# Altium PCB Печатная плата Peggy Tracker.PcbDoc
Units mm, origin at the board's own origin, x right, y up, seen from the top; angles counter-clockwise.
Board outline 35 x 62 mm, 2 copper layers (Top Layer, Bottom Layer), stack 1.534 mm thick; 43 components, 34 nets, 130 pads, 81 vias.
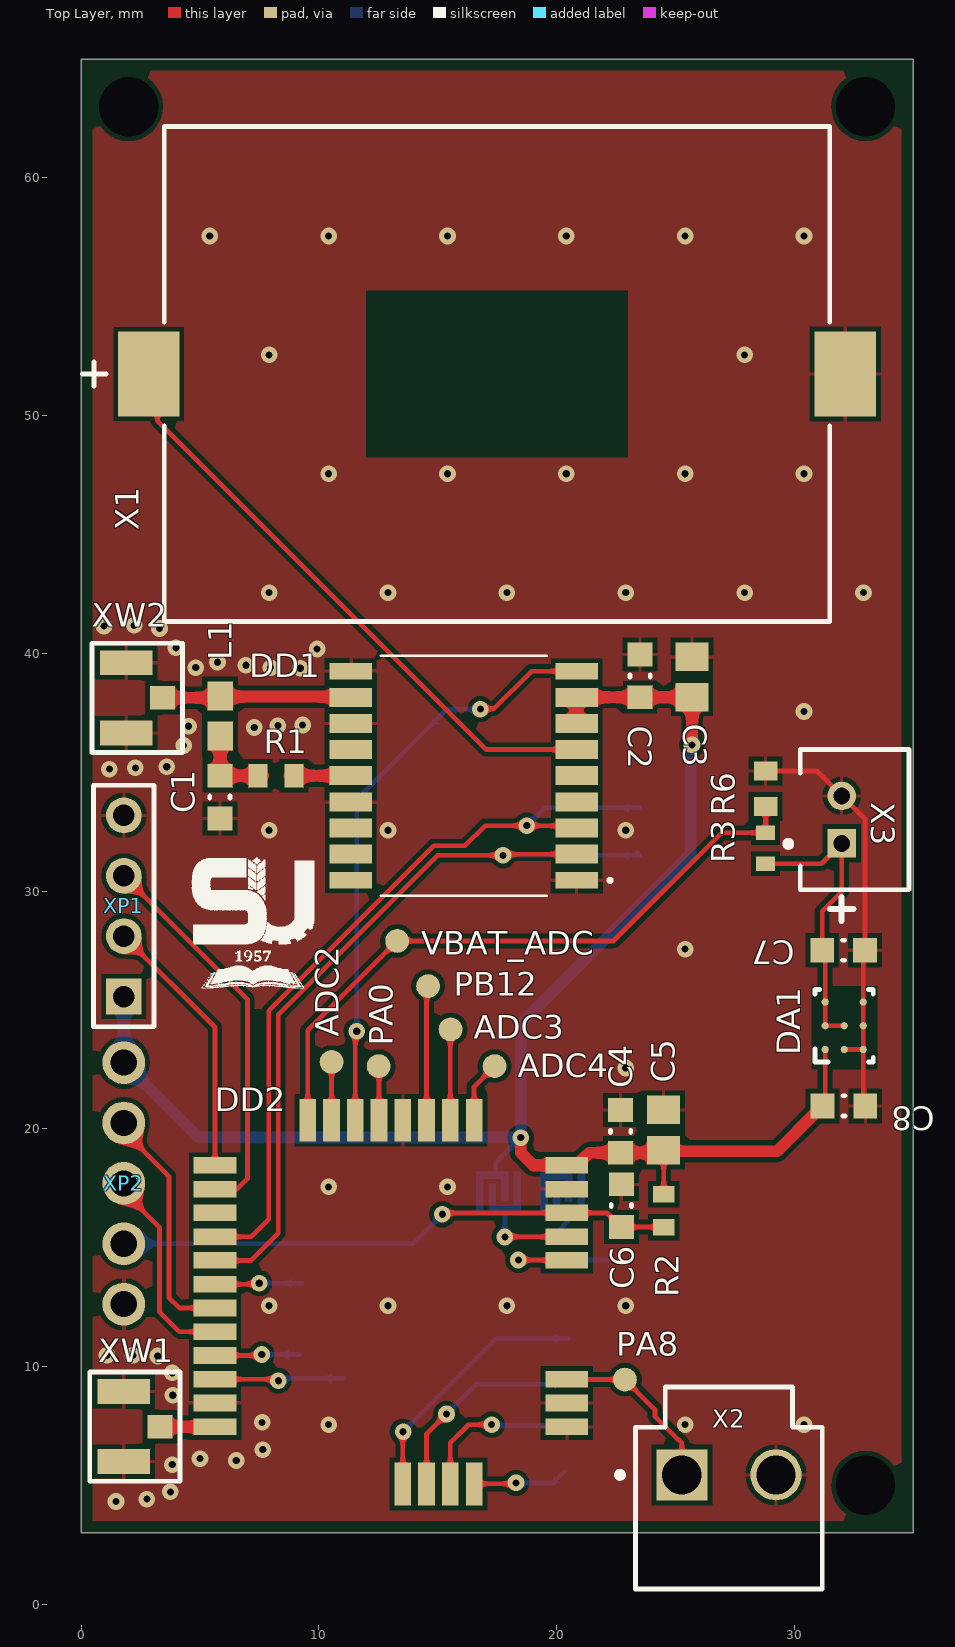
[diagram p0: Top Layer view]
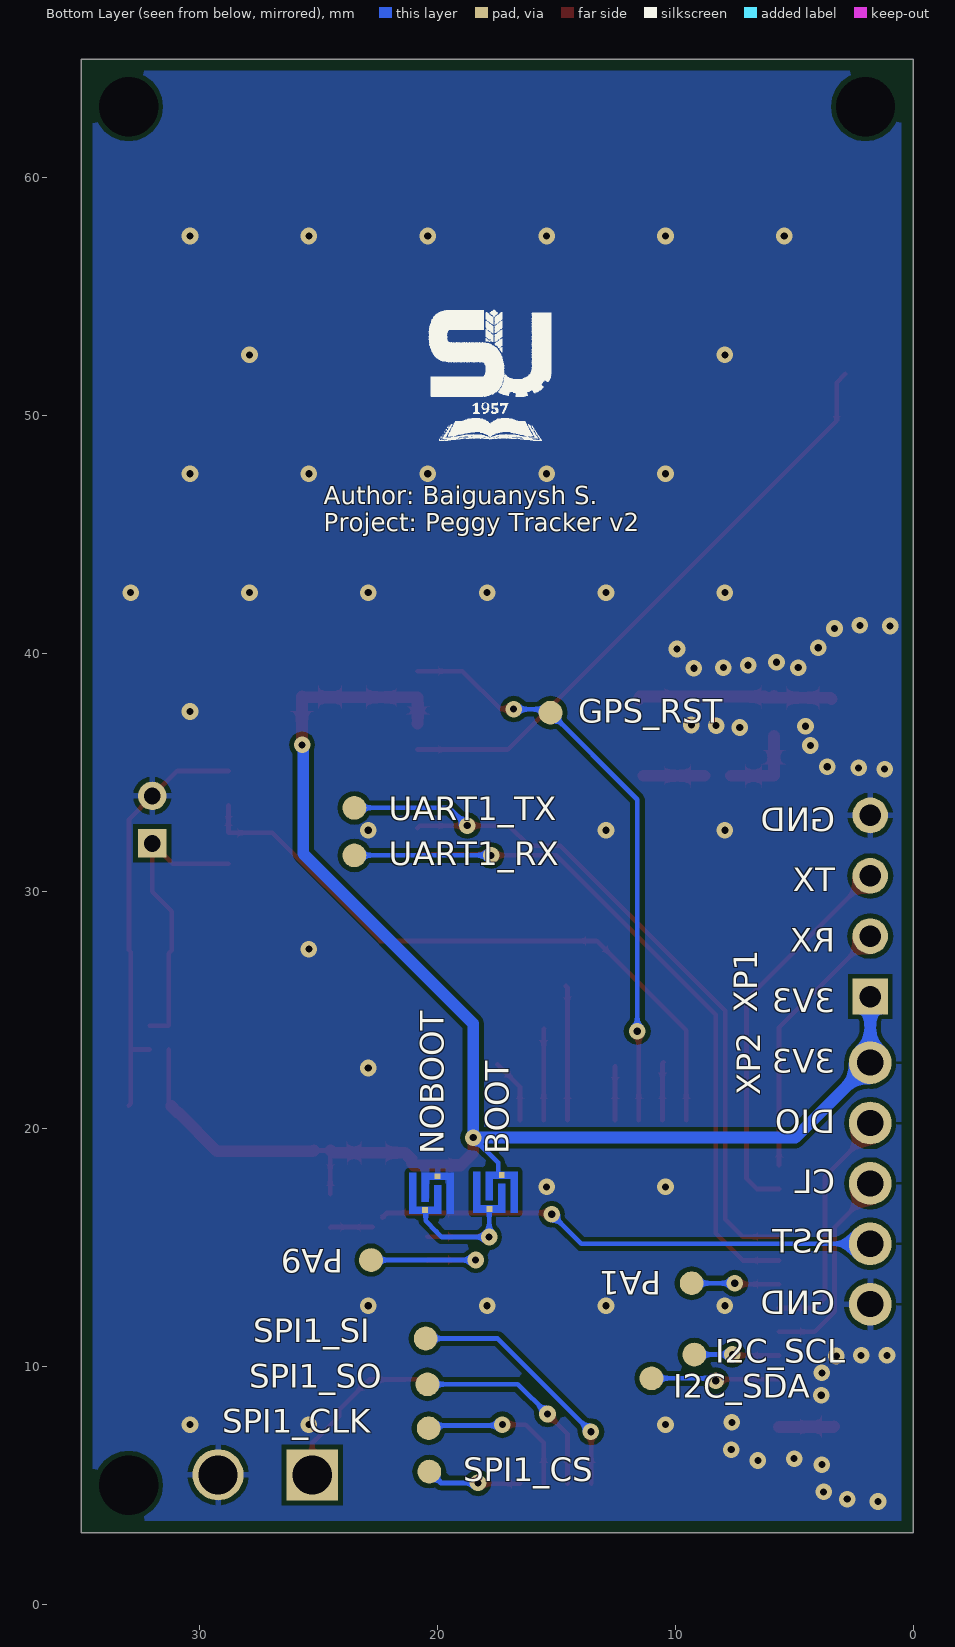
[diagram p1: Bottom Layer view, seen from below]
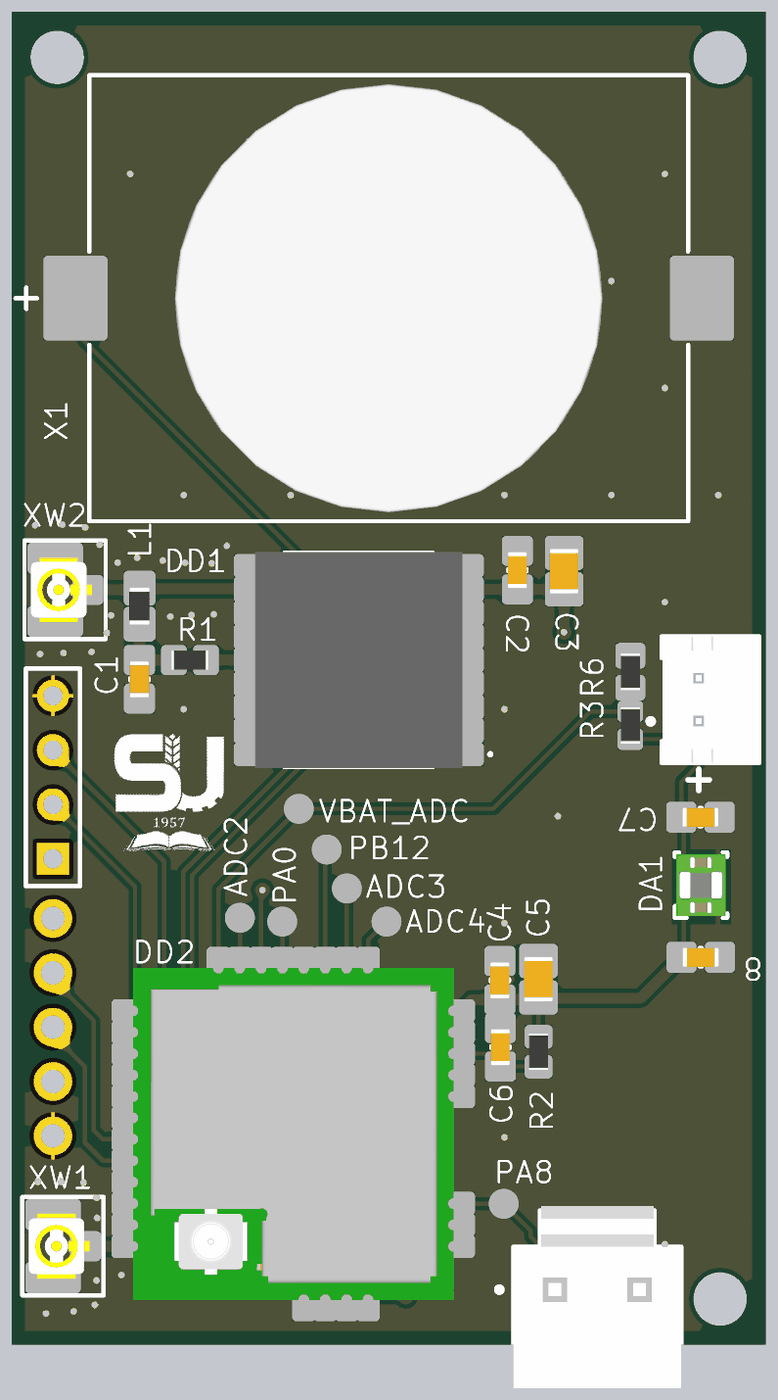
[diagram p2: 3D render of the assembled board from above, using the file's embedded part models]

## Layer stack, top to bottom
Top Solder: solder mask 0.0127, Solder Resist, Dk 3.3
Top Layer: signal copper 0.0178
Dielectric1: core 1.4986, FR-4, Dk 4.3
Bottom Layer: signal copper 0.0178
Bottom Solder: solder mask 0.0127, Solder Resist, Dk 3.3

## Board outline
0,3 0,65 35,65 35,3

## Design rules (kind name [scope] priority, off if disabled: settings)
Clearance [All] p1: gap=0.2 ignorepadtopadclearanceinfootprint=TRUE
ComponentClearance [All] p1: gap=0.25 collisioncheckmode=3 verticalgap=0.25 showdistances=FALSE
DiffPairsRouting [All] p1: maxlimit=0.25 minlimit=0.15 mostfreqgap=0.25 toplayer_minwidth=0.15 toplayer_maxwidth=0.254 toplayer_prefwidth=0.254 bottomlayer_minwidth=0.15 bottomlayer_maxwidth=0.254 bottomlayer_prefwidth=0.254 maxuncoupledlength=12.7
HoleSize [All] p1: absolutevalues=TRUE maxlimit=8 minlimit=0.3 maxpercent=80.000 minpercent=20.000
MinimumAnnularRing [All] p1: minimumring=0.2
MinimumSolderMaskSliver [All] p1: minsoldermaskwidth=0.2
PasteMaskExpansion [All] p1: expansion=0.2
PlaneClearance [All] p1: clearance=0.381
PlaneConnect [All] p1: pad.planeconnectstyle=Relief pad.reliefexpansion=0.508 pad.reliefentries=4 pad.reliefconductorwidth=0.15 pad.reliefairgap=0.254 via.planeconnectstyle=Direct via.reliefexpansion=0.508 via.reliefentries=4 via.reliefconductorwidth=0.254 via.reliefairgap=0.254
PolygonConnect PolygonConnect_1 [Name = 'GND_to_dcdc'] p1: connectstyle=Direct reliefconductorwidth=0.254 reliefentries=4 polygonreliefangle="90 Angle" airgapwidth=0.254
PolygonConnect PolygonConnect_3.3 [InNet('3.3V') vs InNet('3.3V')] p2: connectstyle=Direct reliefconductorwidth=0.254 reliefentries=4 polygonreliefangle="90 Angle" airgapwidth=0.2
PolygonConnect PolygonConnect_VBAT [InNet('VBAT') vs InNet('VBAT')] p3: connectstyle=Direct reliefconductorwidth=0.254 reliefentries=4 polygonreliefangle="90 Angle" airgapwidth=0.2
PolygonConnect [All] p4: thpad.connectstyle=Relief thpad.reliefconductorwidth=0.15 thpad.reliefentries=4 thpad.polygonreliefangle="90 Angle" thpad.airgapwidth=0.2 smdpad.connectstyle=Relief smdpad.reliefconductorwidth=0.15 smdpad.reliefentries=4 smdpad.polygonreliefangle="90 Angle" smdpad.airgapwidth=0.2 via.connectstyle=Direct via.reliefconductorwidth=0.254 via.reliefentries=4 via.polygonreliefangle="90 Angle" via.airgapwidth=0.254
RoutingCorners [All] p1: cornerstyle=45-Degree minsetback=2.5 maxsetback=2.5
RoutingVias [All] p1: holewidth=0.3 width=0.6 viastyle="Through Hole" minholewidth=0.3 minwidth=0.6 maxholewidth=0.5 maxwidth=0.8
SMDEntry [All] p1: side=TRUE corner=TRUE anyangle=TRUE
SMDNeckDown [All] p1: percent=100.000
SilkToSilkClearance [All] p1: silktosilkclearance=0.15
SilkToSolderMaskClearance SilkscreenOverComponentPads [IsPad] p1: minsilkscreentomaskgap=0.15 clearancetoexposedcopper=TRUE
SolderMaskExpansion [All] p1: expansion=0.2 istentingtop=FALSE
Width [All] p1: maxlimit=1 minlimit=0.15 preferedwidth=0.25 minimp=50.000000 maximp=50.000000 favimp=50.000000
20 further rules are at their usual default settings.

## Components (designator, comment, footprint, x,y, rotation, side; value= is the part's Value field where it differs from the comment)
ADC2 "TP_1MM" "New footprint 1" 10.541,22.809 r0 top
ADC3 "TP_1MM" "New footprint 1" 15.545,24.181 r90 top
ADC4 "TP_1MM" "New footprint 1" 17.399,22.631 r270 top
BOOT "Jumper_solderable" JUMPER-Footprint-3 17.55,17.275 r180 bottom
C1 "GCM188R71H103KA37D" CAPC1608X09N 5.842,33.949 r270 top value=10nF
C2 "GCM188R71H104KA57D" CAPC1608X09N 23.52,39.051 r90 top value=100nF
C3 "CL21Y106KPQVPNE" CAPC2013X135X45NL10T25 25.705,39.001 r270 top value=10µF
C4 "GCM188R71H104KA57D" CAPC1608X09N 22.7,19.888 r270 top value=100nF
C5 "CL21Y106KPQVPNE" CAPC2013X135X45NL10T25 24.505,19.939 r270 top value=10µF
C6 "GCM188R71H104KA57D" CAPC1608X09N 22.727,16.763 r270 top value=100nF
C7 "GCM188R71H104KA57D" CAPC1608X09N 32.08,27.508 r0 top value=100nF
C8 "GCM188R71H104KA57D" CAPC1608X09N 32.093,20.964 r0 top value=100nF
DA1 "TPS82698SIPR" SIP0008A 32.106,24.333 r90 top
DD1 "MAX-M8C-0" MAXM8C0 16.1,34.85 r0 top
DD2 "RAK3172(H)" RAK3172(H)-Footprint-1 20.536,4.96 r90 top
GPS_RST "TP_1MM" "New footprint 1" 15.25,37.5 r0 bottom
I2C_SCL "TP_1MM" "New footprint 1" 9.2,10.5 r0 bottom
I2C_SDA "TP_1MM" "New footprint 1" 11,9.5 r0 bottom
L1 "LQW18AN27NJ00D" INDC1608X10M 5.85,37.366 r90 top
NOBOOT "Jumper_solderable" JUMPER-Footprint-3 20.25,17.225 r180 bottom
PA0 "TP_1MM" "New footprint 1" 12.522,22.631 r270 top
PA1 "TP_1MM" "New footprint 1" 9.31,13.5 r270 bottom
PA8 "TP_1MM" "New footprint 1" 22.879,9.449 r0 top
PA9 "TP_1MM" "New footprint 1" 22.8,14.475 r0 bottom
PB12 "TP_1MM" "New footprint 1" 14.6,26 r90 top
R1 "SG73P1JTTD100J" RESC1608X55X25ML10T15 8.204,34.849 r0 top value=10
R2 "RMCF0603FT10K0" RESC1608X55X25NL10T15 24.511,16.55 r90 top
R3 "RMCF0603FT100K" RESC1608X55X25LL10T15 28.8,31.8 r270 top
R6 "ERJ-3EKF2373V" RESC1608X55X25ML10T15 28.8,34.3 r270 top
SPI1_CLK "TP_1MM" "New footprint 1" 20.375,7.4 r0 bottom
SPI1_CS "TP_1MM" "New footprint 1" 20.35,5.575 r0 bottom
SPI1_SI "TP_1MM" "New footprint 1" 20.5,11.175 r0 bottom
SPI1_SO "TP_1MM" "New footprint 1" 20.425,9.25 r0 bottom
UART1_RX "TP_1MM" "New footprint 1" 23.5,31.5 r90 bottom
UART1_TX "TP_1MM" "New footprint 1" 23.5,33.5 r90 bottom
VBAT_ADC "TP_1MM" "New footprint 1" 13.3,27.9 r90 top
X1 "BA2032SM" MPD-BA2032SM_V 17.5,51.75 r0 top
X2 "B2P-VH(LF)(SN)" JST-B2P-VH(LF)(SN)_V 27.254,4.039 r0 top
X3 "B2B-PH-K-S" JST-S2B-PH-K-S_V 34.45,33 r90 top
XP1 "61300411121" 20021311-00010T4LF-Footprint-1 1.8,25.56 r90 top
XP2 "5-146278-5" 5-146278-8-Footprint-1 1.8,17.7 r270 top
XW1 "CONUFL001-SMD-T" u.Fl 2.565,7.468 r90 top
XW2 "CONUFL001-SMD-T" u.Fl 2.667,38.128 r90 top

## Footprints (in the part's own frame and the unit in brackets; to place one, negate y for a bottom-side part, rotate by r counter-clockwise, add the part's x,y. Pads: shape width x height; smd on the part's side, far side on the other; paste and mask are expansions set on the pad)
5-146278-8-Footprint-1 [mm]
  round 1.8 hole 1.1: 1(-5.08,0) 2(-2.54,0) 3(0,0) 4(2.54,0) 5(5.08,0)
20021311-00010T4LF-Footprint-1 [mm]
  rect 1.5x1.5 hole 0.9: 1(0,0)
  round 1.5 hole 0.9: 2(2.54,0) 3(5.08,0) 4(7.62,0)
  silkscreen extent -1.27,-1.27 8.89,1.27
CAPC1608X09N [mm] "Chip Capacitor, 2-Leads, Body 1,60x0,80mm, IPC Medium Density"
  rect 1x1.05 smd: 1(-0.9,0) 2(0.9,0)
  silkscreen extent -0.05,-0.43 0.05,0.43, body extent -0.85,-0.45 0.85,0.45, height 0.9
CAPC2013X135X45NL10T25 [mm] "Chip Capacitor, 2-Leads, Body 2.10x1.35mm, IPC Medium Density"
  rect 1.2x1.4 smd: 1(-0.85,0) 2(0.85,0)
  body extent -1.05,-0.67 1.05,0.67, height 1.35
INDC1608X10M [mm] "Chip Inductor, 2-Leads, Body 1,60x0,80mm, IPC Low Density"
  rect 1.22x1.08 smd: 1(-0.84,0) 2(0.84,0)
  body extent -0.87,-0.48 0.87,0.48, height 0.95
JST-B2P-VH(LF)(SN)_V [mm] "THD, 2-Leads, Body 8.5x7.86mm, Pitch 3.96mm"
  rect 2.15x2.15 hole 1.65: 1(-1.98,1.4)
  round 2.15 hole 1.65: 2(1.98,1.4)
  silkscreen extent -4.7,-3.4 3.93,5.1, body extent -3.93,-3.2 3.93,5.3, height 10.9
JST-S2B-PH-K-S_V [mm] "THD, 2-Leads, Body 7.6x5.9mm, Pitch 2mm"
  rect 1.2x1.2 hole 0.7: 1(-1,2.45)
  round 1.2 hole 0.7: 2(1,2.45)
  silkscreen extent -2.95,-0.38 2.95,4.82, body extent -2.95,-0.34 2.95,4.16, height 6
JUMPER-Footprint-3 [mm]
  rect 0.25x0.25 smd paste+0 mask+0: 1(-0.275,-0.65)
  rect 0.25x0.25 smd paste-2.54 mask-2.54: 2(0.25,0.775)
  Top Layer region: 0.1,-0.5 0.1,0.4 0.4,0.4 0.4,-0.8 -0.95,-0.8 -0.95,0.925 -0.65,0.925 -0.65,-0.5
  Top Layer region: -0.125,0.625 -0.125,-0.288 -0.425,-0.288 -0.425,0.925 0.925,0.925 0.925,-0.8 0.625,-0.8 0.625,0.625
MAXM8C0 [mm]
  rect 1.8x0.7 smd: 1(4.75,-4.4) 9(4.75,4.4) 10(-4.75,4.4) 18(-4.75,-4.4)
  rect 1.8x0.8 smd: 2(4.75,-3.3) 3(4.75,-2.2) 4(4.75,-1.1) 5(4.75,0) 6(4.75,1.1) 7(4.75,2.2) 8(4.75,3.3) 11(-4.75,3.3) 12(-4.75,2.2) 13(-4.75,1.1) 14(-4.75,0) 15(-4.75,-1.1) 16(-4.75,-2.2) 17(-4.75,-3.3)
  silkscreen extent -3.5,-5.05 6.2,5.05, body extent -4.85,-5.05 4.85,5.05, height 2.8
MPD-BA2032SM_V [mm] "Coin Cell Holder, 2-Leads, Body 28x16mm"
  rect 2.6x3.56 smd: 1(-14.65,0) 2(14.65,0)
  Top Layer pour cut-out: -5.5,3.5 -5.5,-3.5 5.5,-3.5 5.5,3.5
  silkscreen extent -17.45,-10.41 14,10.41, body extent -14,-10 14,10, height 6.7
"New footprint 1" [mm]
  round 1 smd: 1(0,0)
RAK3172(H)-Footprint-1 [mm]
  rect 0.7x1.8 smd: 1(13.5,14.9) 2(12.5,14.9) 3(11.5,14.9) 4(10.5,14.9) 5(9.5,14.9) 6(8.5,14.9) 7(7.5,14.9) 8(6.5,14.9) 9(5.5,14.9) 10(4.5,14.9) 11(3.5,14.9) 12(2.5,14.9) 17(2.5,0.1) 18(3.5,0.1) 19(4.5,0.1) 20(9.5,0.1) 21(10.5,0.1) 22(11.5,0.1) 23(12.5,0.1) 24(13.5,0.1)
  rect 1.8x0.7 smd: 13(0.1,7) 14(0.1,6) 15(0.1,5) 16(0.1,4) 25(15.4,4) 26(15.4,5) 27(15.4,6) 28(15.4,7) 29(15.4,8) 30(15.4,9) 31(15.4,10) 32(15.4,11)
  body extent 0,0 15.5,15, height 3.5
RESC1608X55X25LL10T15 [mm] "Chip Resistor, 2-Leads, Body 1.70x0.90mm, IPC High Density"
  rect 0.6x0.8 smd: 1(-0.65,0) 2(0.65,0)
  body extent -0.85,-0.45 0.85,0.45, height 0.55
RESC1608X55X25ML10T15 [mm] "Chip Resistor, 2-Leads, Body 1.70x0.90mm, IPC Low Density"
  rect 0.8x1 smd: 1(-0.75,0) 2(0.75,0)
  body extent -0.85,-0.45 0.85,0.45, height 0.55
RESC1608X55X25NL10T15 [mm] "Chip Resistor, 2-Leads, Body 1.70x0.90mm, IPC Medium Density"
  rect 0.7x0.9 smd: 1(-0.7,0) 2(0.7,0)
  body extent -0.85,-0.45 0.85,0.45, height 0.55
SIP0008A [mm]
  round 0.3 smd paste+0.02 mask+0.051: A1(-1,0.8) A2(0,0.8) A3(1,0.8) B1(-1,0) B2(0,0) C1(-1,-0.8) C2(0,-0.8) C3(1,-0.8)
  silkscreen extent -1.53,-1.22 1.53,1.22, body extent -1.45,-1.15 1.45,1.15, height 0.93
u.Fl [mm] "U.FL (UMCC), IPEX MHF1"
  rect 1x1.05 smd: 1(0,-0.763)
  rect 1.05x2.2 smd: 2(-1.475,0.763) 2(1.475,0.763)
  silkscreen extent -2.3,-1.6 2.3,2.2, body extent -1.5,-0.95 1.5,1.9, height 1.27

## Part data
ADC2 ADC3 ADC4 GPS_RST I2C_SCL I2C_SDA PA0 PA1 PA8 PA9 PB12 SPI1_CLK SPI1_CS SPI1_SI SPI1_SO UART1_RX UART1_TX VBAT_ADC: library part CMP-002-00080-4, "Test Point, 1mm diam", Manufacturer=SRG_DEV, Manufacturer Part Number=TP_1MM, Pins=1
BOOT NOBOOT: library part CMP-002-00130-2, "Solderable Jumper", Manufacturer="Home made", Max Operating Temperature=125°C, Min Operating Temperature=-40°C, Connector Type="Male Pin", Gender=Male, Manufacturer Part Number="Home made", Pins=2
C1: library part CMP-001-00124-4, "CAP CER 10000PF 50V X7R 0603", Case Code (Metric)=1608, Case/Package=0603, Dielectric=X7R, Manufacturer=Murata, Max Operating Temperature=125°C, Min Operating Temperature=-55°C, Package Quantity=1, Ratings=AEC-Q200, Tolerance=10%, Voltage=50V, ComponentLink1Description=https://datasheet.ciiva.com/16624/product-16624561.pdf?src-supplier=Avnet+Europe, ComponentLink1URL=https://datasheet.ciiva.com/16624/product-16624561.pdf?src-supplier=Avnet+Europe, ComponentLink2Description=https://datasheet.ciiva.com/132/product-132006.pdf?src-supplier=Digi-Key, ComponentLink2URL=https://datasheet.ciiva.com/132/product-132006.pdf?src-supplier=Digi-Key, ComponentLink3Description=https://datasheet.ciiva.com/11789/0900766b80ef92d0-11789046.pdf?src-supplier=RSComponents, ComponentLink3URL=https://datasheet.ciiva.com/11789/0900766b80ef92d0-11789046.pdf?src-supplier=RSComponents, ComponentLink4Description=https://datasheet.ciiva.com/18183/getdatasheetpartid-178897-18183622.pdf?src-supplier=Verical, ComponentLink4URL=https://datasheet.ciiva.com/18183/getdatasheetpartid-178897-18183622.pdf?src-supplier=Verical, ComponentLink5Description=https://datasheet.ciiva.com/132/product-132007.pdf?src-supplier=Digi-Key, ComponentLink5URL=https://datasheet.ciiva.com/132/product-132007.pdf?src-supplier=Digi-Key, ComponentLink6Description=https://datasheet.ciiva.com/16213/s0717e-16213899.pdf?src-supplier=Future+Electronics, ComponentLink6URL=https://datasheet.ciiva.com/16213/s0717e-16213899.pdf?src-supplier=Future+Electronics, Construction=Flat, Depth=0.8mm, Design Item ID=1_7, Height=0.8mm, Lead Free="Lead Free", Length=1.6mm, Lybrary Path=Capacitors.SchLib, Manufacturer Part Number=GCM188R71H103KA37D, Mount="Surface Mount", Packaging="Tape and Reel", Pricing 1="1=0,17000, 10=0,11900, 50=0,06740, 100=0,05580, 500=0,03912, 1000=0,03239 (USD)", Radiation Hardening=No, REACH SVHC="No SVHC", RoHS=Yes, RoHS Compliant=Yes, Series=GCM, Source=Meteo_1.SCHLIB, Stock 1=4826468, Termination=SMD/SMT, Thickness=0.035inch, Voltage Rating=50V, Voltage Rating (DC)=50V, Width=0.031inch
C2 C4 C6 C7 C8: library part CMP-001-00128-5, "CAP CER 0.1UF 50V X7R 0603", Case Code (Metric)=1608, Case/Package=0603, Color=Grey, Dielectric=X7R, Manufacturer=Murata, Max Operating Temperature=125°C, Min Operating Temperature=-55°C, Package Quantity=1, Ratings=AEC-Q200, Tolerance=10%, Voltage=50V, Approvals=CSA,UR, ComponentLink1Description=https://datasheet.ciiva.com/16624/product-16624562.pdf?src-supplier=Avnet+Europe, ComponentLink1URL=https://datasheet.ciiva.com/16624/product-16624562.pdf?src-supplier=Avnet+Europe, ComponentLink2Description=https://datasheet.ciiva.com/133/product-133574.pdf?src-supplier=Digi-Key, ComponentLink2URL=https://datasheet.ciiva.com/133/product-133574.pdf?src-supplier=Digi-Key, ComponentLink3Description=https://datasheet.ciiva.com/133/product-133575.pdf?src-supplier=Digi-Key, ComponentLink3URL=https://datasheet.ciiva.com/133/product-133575.pdf?src-supplier=Digi-Key, ComponentLink4Description=https://datasheet.ciiva.com/18183/getdatasheetpartid-98693-18183626.pdf?src-supplier=Verical, ComponentLink4URL=https://datasheet.ciiva.com/18183/getdatasheetpartid-98693-18183626.pdf?src-supplier=Verical, ComponentLink5Description=https://datasheet.ciiva.com/11786/0900766b80ef92d0-11786863.pdf?src-supplier=RSComponents, ComponentLink5URL=https://datasheet.ciiva.com/11786/0900766b80ef92d0-11786863.pdf?src-supplier=RSComponents, ComponentLink6Description=https://datasheet.ciiva.com/133/product-133573.pdf?src-supplier=Digi-Key, ComponentLink6URL=https://datasheet.ciiva.com/133/product-133573.pdf?src-supplier=Digi-Key, ComponentLink7Description=https://datasheet.ciiva.com/2989/product-2989242.pdf?src-supplier=Avnet, ComponentLink7URL=https://datasheet.ciiva.com/2989/product-2989242.pdf?src-supplier=Avnet, ComponentLink8Description=https://datasheet.ciiva.com/16497/product-16497247.pdf?src-supplier=Future+Electronics, ComponentLink8URL=https://datasheet.ciiva.com/16497/product-16497247.pdf?src-supplier=Future+Electronics, Construction=Flat, Depth=0.8mm, Design Item ID=1_16, Height=0.8mm, Lead Free="Lead Free", Length=1.6mm, Manufacturer Part Number=GCM188R71H104KA57D, Mount="Surface Mount", Packaging="Tape and Reel", Pricing 1="1=0,11000, 10=0,07900, 50=0,04280, 100=0,03500, 500=0,02502, 1000=0,01966 (USD)", Radiation Hardening=No, REACH SVHC="No SVHC", RoHS=Yes, RoHS Compliant=Yes, Series=GCM, Source=Meteo_1.SCHLIB, Stock 1=4755830, Termination=SMD/SMT, Thickness=0.035inch, Voltage Rating=50V, Voltage Rating (DC)=50V, Width=0.031inch
C3 C5: library part CMP-001-00143-4, "CAP CER 10UF 10V X7S 0805", Capacitance=10µF, Case Code (Imperial)=0805, Case Code (Metric)=2012, Manufacturer=Samsung, Max Operating Temperature=125°C, Min Operating Temperature=-55°C, Ratings=AEC-Q200, Tolerance=10%, Voltage Rating=10V, Case/Package=0805, Features="Soft Termination", Lead Free="Lead Free", Length=0.079inch, Manufacturer Part Number=CL21Y106KPQVPNE, Mount="Surface Mount", Packaging="Tape and Reel", RoHS Compliant=Yes, Thickness=0.055inch, Width=0.049inch
DA1: library part CMP-019-00081-1, "700-mA, High-Efficiency MicroSiP Step-Down Converter (PROFILE <1mm) 8-uSiP -40 to 85", Case/Package=BGA, Manufacturer="Texas Instruments", Max Input Voltage=4.8V, Max Operating Temperature=85°C, Max Output Current=800mA, Min Input Voltage=2.3V, Min Operating Temperature=-40°C, Output Voltage=3V, Package Quantity=3000, Quiescent Current=23uA, Switching Frequency=3MHz, Efficiency=95%, Features=UVLO,OCP,OTP,SCP, Height=0.04inch, Lead Free="Lead Free", Length=0.11inch, Manufacturer Part Number=TPS82698SIPR, Mount="Surface Mount", Number of Outputs=1, Number of Pins=8, Operating Supply Voltage=4.8V, Output Current=800mA, Packaging="Tape and Reel", Radiation Hardening=No, RoHS Compliant=Yes, Voltage - Output 1=3V, Width=0.09inch
DD1: library part CMP-021-00007-2, "IC Receiver Gps/gnss 18LCC", Manufacturer=u-blox, Manufacturer Part Number=MAX-M8C-0, RoHS Compliant=Yes
DD2: library part CMP-00025-00003-1, "RAK3172 WisDuo LPWAN Module", Manufacturer="RAK Wireless", Manufacturer Part Number=RAK3172(H)
L1: library part CMP-00081-1, "FIXED IND 27NH 440MA 210MOHM SMD", Case Code (Imperial)=0603, Case Code (Metric)=1608, Current Rating=440mA, DC Resistance (DCR)=210mR, Inductance=27nH, Manufacturer=Murata, Max Operating Temperature=125°C, Min Operating Temperature=-55°C, Package Quantity=4000, Resistor Type=Wirewound, Self Resonant Frequency=3.7GHz, Test Frequency=100MHz, Tolerance=5%, Case/Package=0603, Core Material=Non-Magnetic, DC Current=440mA, Depth=1mm, Height=0.8mm, Height - Seated (Max)=0.039inch, Lead Free="Lead Free", Length=1.6mm, Manufacturer Part Number=LQW18AN27NJ00D, Max DC Current=440mA, Military Standard=Not, Mount="Surface Mount", Packaging="Tape and Reel", Q Factor=40, Radiation Hardening=No, Rated Current-Max=440mA, RoHS Compliant=Yes, Saturation Current=440mA, Series=LQW18A_00, Shielding=Unshielded, Termination=SMD/SMT, Weight=0.000106oz, Width=0.8mm
R1: library part CMP-00014-2, "RES SMD 10 OHM 5% 1/5W 0603", Case Code (Imperial)=0603, Case Code (Metric)=1608, Manufacturer="KOA Speer", Max Operating Temperature=155°C, Min Operating Temperature=-55°C, Power Rating=200mW, Resistance=10, Resistor Type="Thick Film", Temperature Coefficient=100ppm/°C, Tolerance=5%, Voltage Rating=50V, Case/Package=0603, Component Comment="10 200mW", Height=0.45mm, Length=1.6mm, Manufacturer Part Number=SG73P1JTTD100J, Packaging="Tape and Reel", RoHS Compliant=Yes, Series=SG73, Termination=SMD/SMT, Voltage Rating (DC)=50V, Weight=7.1E-05oz, Width=0.8mm
R2: library part CMP-009-00252-4, "RES SMD 10K OHM 1% 1/10W 0603", Case Code (Imperial)=0603, Case Code (Metric)=1608, Manufacturer="Stackpole Electronics Inc", Max Operating Temperature=155°C, Max Power Dissipation=100mW, Min Operating Temperature=-55°C, Resistance=10k, Resistor Type="Thick Film", Temperature Coefficient=100ppm/°C, Tolerance=1%, Voltage Rating=75V, Case/Package=0603, Component Comment="10k 100mW", Construction=Rectangular, Contact Plating=Tin,Matte, Depth=0.8mm, Features="Automotive AEC-Q200", Height=0.022inch, Lead Free="Lead Free", Length=1.55mm, Manufacturer Part Number=RMCF0603FT10K0, Military Standard=Not, Mount="Surface Mount", Number of Terminations=2, Packaging="Tape and Reel", Pins=2, Power Rating=100mW, Radiation Hardening=No, RoHS Compliant=Yes, Series=RMCF, Size Code=0603, Width=0.031inch
R3: library part CMP-009-00253-1, "RES 100K OHM 1% 1/10W 0603", Case Code (Imperial)=0603, Case Code (Metric)=1608, Manufacturer="Stackpole Electronics Inc", Max Operating Temperature=155°C, Max Power Dissipation=100mW, Min Operating Temperature=-55°C, Resistance=100k, Resistor Type="Thick Film", Temperature Coefficient=100ppm/°C, Tolerance=1%, Working Voltage=75V, Case/Package=0603, Component Comment="100k 100mW", Construction=Rectangular, Contact Plating=Tin,Matte, Depth=0.8mm, Features="Automotive AEC-Q200", Height=0.022inch, Lead Free="Lead Free", Length=1.55mm, Manufacturer Part Number=RMCF0603FT100K, Military Standard=Not, Mount="Surface Mount", Number of Terminations=2, Packaging="Tape and Reel", Power Rating=100mW, Radiation Hardening=No, RoHS Compliant=Yes, Series=RMCF, Width=0.031inch
R6: library part CMP-009-00311-2, "RES SMD 237K OHM 1% 1/10W 0603", Case Code (Imperial)=0603, Case Code (Metric)=1608, Manufacturer=Panasonic, Max Operating Temperature=155°C, Max Power Dissipation=100mW, Min Operating Temperature=-55°C, Package Quantity=1, Resistance=237k, Resistance Tolerance=1%, Resistor Type="Thick Film", Temperature Coefficient=100ppm/°C, Voltage Rating=75V, Voltage Rating (DC)=50V, Case/Package=0603, Component Comment="237k 100mW", Construction=Rectangular, Contact Plating=Tin, Depth=0.8mm, Features="Automotive AEC-Q200", Height=0.45mm, Length=1.6mm, Manufacturer Part Number=ERJ-3EKF2373V, Military Standard=Not, Mount="Surface Mount", Number of Terminations=2, Packaging="Tape and Reel", Power Rating=100mW, Radiation Hardening=No, REACH SVHC=Yes, RoHS Compliant=Yes, Series=ERJ, Technology="THICK FILM", Termination=SMD/SMT, Tolerance=1%, Width=0.8mm
X1: library part CMP-002-00003-13, "Battery Holder Coin 20MM SMD", Manufacturer="Memory Protection Devices", Max Operating Temperature=225°C, Min Operating Temperature=-40°C, Package Quantity=100, Case/Package=BA2032SM, Connector Type=BatteryHolder, Diameter=20mm, Lead Free="Lead Free", Manufacturer Part Number=BA2032SM, Mount="Surface Mount,PCB", Mounting Technology=SM, Number of Cells=1, Pins=2, RoHS Compliant=True, Series=-, Termination=SMD/SMT
X2: library part CMP-002-00025-5, "Male Header, Pitch 3.96 mm, 1 x 2 Position, Height 10.9 mm, Tail Length 3.7 mm, -25 to 85 degC, RoHS, Bulk", Manufacturer=JST, Manufacturer Part Number=1, Max Operating Temperature=85°C, Min Operating Temperature=-25°C, Package Description="Male Header, Pitch 3.96 mm, 1 x 2 Position, Height 10.9 mm, Tail Length 3.7 mm", Case/Package=B2P-VH(LF)(SN), Connector Type=Header, Datasheet URL=http://www.jst-mfg.com/product/pdf/eng/eVH.pdf, Datasheet Version=May-16, Gender=Male, Manufacturer URL=http://www.jst.com/home2.html, Mounting Technology=TH, Package Reference=B2P-VH(LF)(SN), Pins=2, RoHS Compliant=Unknown
X3: library part CMP-002-00125-1, "CONN HEADER VERT 2POS 2MM", Case/Package=S2B-PH-K-S, Manufacturer="Japan Solderless Terminals", Manufacturer Part Number="JST B2B-PH-K-S(LF)(SN)", Max Operating Temperature=85°C, Min Operating Temperature=-25°C, Connector Type=Header, Gender=Male, Height=0.35inch, Length=0.2inch, Mounting Technology=SM, Pins=2, RoHS Compliant=Unknown, Weight=0.0625lb, Width=0.24inch
XP1: library part CMP-002-00092-3, "Conn Unshrouded Header HDR 4 POS 2.54mm Solder ST Thru-Hole Bag", Color=Black, Manufacturer="Würth Elektronik", Connector Type="Male Pin", Contact Material=Copper, Contact Mating Length=0.236inch, Contact Plating=Gold, Gender=Male, Lead Free="Lead Free", Manufacturer Part Number=61300411121, Mount="Through Hole", Number of Contacts=4, Number of Positions=4, Number of Rows=1, Packaging=Bulk, Pins=4, Pitch=0.1inch, Position=4, REACH SVHC=Unknown, RoHS Compliant=Yes, Termination=Solder
XP2: library part CMP-002-00131-1, "Conn Unshrouded Header HDR 5 POS 2.54mm Solder ST Thru-Hole Carton", Color=Black, Contact Current Rating=3A, Flammability Rating="UL94 V-0", High Temperature Housing=Yes, Manufacturer="TE Connectivity", Manufacturer Part Number=5-146278-8, Max Operating Temperature=105°C, Min Operating Temperature=-65°C, Package Quantity=480, Approvals=CSA, Board Standoff="Yes (With)", Connector Type=Plug,Header,Pin, Contact Gender=Male, Contact Material=Bronze, Contact Mating Length=0.23inch, Contact Plating=Tin, Contact Post Length=0.12inch, Contact Protection="No (Without)", Contact Shape=Square, Contact Type="Male Pin", Depth=2.34mm, ELV=Compliant, Gasket="No (Without)", Gender=Male, High Speed Serial Data Connector=No, Housing Color=Black, Housing Material=Polymer, Keyed=No, Lead Free="Lead Free", Length=12.29mm, Mating Alignment="No (Without)", Mating Connector Lock="No (Without)", Mount="Through Hole", Number of Contacts=5, Number of Positions=5, Number of Rows=1, Orientation=Straight, Packaging=Carton, PCB Mount Retention=Without, PCB Mounting Orientation=Vertical, PCB Thickness=0.062inch, Pins=5, Pitch=2.54mm, Radiation Hardening=No, RoHS Compliant=Yes, Row Spacing=2.54mm, Selectively Loaded="No (Without)", Series="AMPMODU MOD II", Stabilizers="No (Without)", Strain Relief="No (Without)", Termination="Through Hole"
XW1 XW2: library part CMP-002-00096-2, "CONN UMC JACK STR SMD", Dielectric Material=Polymer, Housing Color=White, Manufacturer="Linx Technologies Inc.", Max Frequency=6GHz, Max Operating Temperature=90°C, Min Operating Temperature=-40°C, Body Material="Copper Alloy", Body Plating=Gold, Connector Type="Male Pin", Contact Material=Brass, Contact Plating=Gold, Fastening Type=Snap, Impedance=50R, Manufacturer Part Number=CONUFL001-SMD-T, Mount="Surface Mount", Number of Ports=1, Packaging="Tape and Reel", Pins=2, RoHS Compliant=Yes, Termination=Solder

## Free pads (board coordinates)
  round 0.5 hole 2.5 unplated: 1(33,5) 2(33,63) 3(2,63)

## Via types
v1: diameter 0.7, hole 0.3, Top Layer to Bottom Layer, tented both sides, 81 vias

## Nets (pads, with @x,y where several pads share a name; then routed paths per layer and width w, separated by ;. In a path a pad name is that pad's centre, name@x,y a point inside that pad or via, vN(x,y) a via of type N, cw(c..) or ccw(c..) an arc to the next point about the centre after c; other vN are vias at no path point)
3.3V: BOOT.2 C2.1 C3.2 C4.2 C5.2 C8.1 DA1.A1 DD1.7 DD1.8 DD2.24 R2.2 XP1.1 XP2.1 | length 69.2
  Top Layer w0.2: R2.2 24.511,19.083 C5.2 C5.2@25.205,19.089 ; C8.1 31.306,21.077 DA1.A1
  Top Layer w0.5: v1(18.5,19.625) 18.5,18.99 19.03,18.46 DD2.24 20.986,18.46 21.086,18.56 21.086,18.695 21.379,18.988 C4.2 24.404,18.988 C5.2 ; DD1.7 20.835,37.065 20.835,38.135 DD1.8 C2.1 ; C2.1 C3.2 ; C5.2@25.205,19.089 25.24,19.054 29.282,19.054 30.918,20.689 30.943,20.689 31.193,20.939 C8.1 ; v1(25.7,36.15) 25.705,36.155 C3.2 ; C3.2@25.705,38.185 C3.2
  Bottom Layer w0.2: 17.45,18.1 17.45,18.575 v1(18.5,19.625)
  Bottom Layer w0.5: XP1.1 XP2.1 4.955,19.625 v1(18.5,19.625) 18.5,24.425 25.65,31.575 25.65,36.1 v1(25.7,36.15)
GND: C1.2 C2.2 C3.1 C4.1 C5.1 C6.1 C7.2 C8.2 DA1.B1 DA1.C1 DA1.C2 DA1.C3 DD1.1 DD1.10 DD1.12 DD1.15 DD2.11 DD2.17 DD2.18 DD2.23 DD2.28 NOBOOT.2 R6.1 X1.2 X2.2 X3.2 XP1.4 XP2.5 XW1.2 XW2.2 | length 17.9
  Top Layer w0.2: R6.1 30.95,35.05 X3.2 32.98,33.02 C7.2 32.906,27.434 DA1.C3 DA1.C2 DA1.C1 ; DA1.B1 DA1.C1 ; C8.2 32.906,21.052 DA1.C1
  other v1: 1.473,4.318 2.769,4.42 3.759,4.724 3.835,5.867 6.528,6.045 5.004,6.121 7.645,6.502 10.414,7.554 25.414,7.554 30.414,7.554 7.62,7.645 3.861,8.788 3.835,9.728 3.226,10.439 1.092,10.465 2.184,10.465 7.914,12.554 12.914,12.554 17.914,12.554 22.914,12.554 10.414,17.554 15.414,17.554 22.914,22.554 25.414,27.554 7.914,32.554 12.914,32.554 22.914,32.554 1.194,35.128 2.286,35.179 3.607,35.23 4.318,36.119 7.29,36.881 4.521,36.932 8.28,36.957 9.322,36.982 30.414,37.554 9.22,39.37 4.826,39.395 7.976,39.395 6.934,39.497 5.74,39.624 9.931,40.183 3.988,40.234 3.302,41.046 0.965,41.148 2.235,41.173 7.914,42.554 12.914,42.554 17.914,42.554 22.914,42.554 27.914,42.554 32.914,42.554 10.414,47.554 15.414,47.554 20.414,47.554 25.414,47.554 30.414,47.554 7.914,52.554 27.914,52.554 5.414,57.554 10.414,57.554 15.414,57.554 20.414,57.554 25.414,57.554 30.414,57.554
GPS_RST: DD1.9 DD2.30 GPS_RST.1 | length 25
  Top Layer w0.2: DD2.30 11.536,23.536 11.536,24.1 v1(11.6,24.1) ; v1(16.8,37.65) 16.817,37.667 17.373,37.667 18.955,39.25 DD1.9
  Bottom Layer w0.2: v1(11.6,24.1) 11.6,33.85 15.393,37.643 16.793,37.643 v1(16.8,37.65)
GPS_RX: DD1.3 DD2.4 UART1_TX.1 | length 32.6
  Top Layer w0.2: DD2.4 7.16,15.46 7.9,16.2 7.9,24.966 14.834,31.9 16.15,31.9 17,32.75 v1(18.75,32.75) 20.75,32.75 DD1.3
  Bottom Layer w0.2: v1(18.75,32.75) 19.5,33.5 UART1_TX.1
GPS_TX: DD1.2 DD2.5 UART1_RX.1 | length 33.6
  Top Layer w0.2: DD2.5 7.16,14.46 8.3,15.6 8.3,24.8 15,31.5 v1(17.75,31.5) 17.8,31.55 DD1.2
  Bottom Layer w0.2: v1(17.75,31.5) UART1_RX.1 UART1_RX.1@23.384,31.616
LORA_RST: C6.2 DD2.22 R2.1 XP2.4 | length 23
  Top Layer w0.2: v1(15.2,16.4) 15.26,16.46 22.129,16.46 22.302,16.287 22.302,16.263 C6.2@22.327,16.263 ; C6.2 24.498,15.863 R2.1
  Bottom Layer w0.2: XP2.4 13.96,15.16 v1(15.2,16.4)
NetADC2_1: ADC2.1 DD2.31 | length 2.5
  Top Layer w0.2: ADC2.1@10.5,22.8 10.541,22.759 10.541,20.365 DD2.31
NetADC3_1: ADC3.1 DD2.26 | length 3.9
  Top Layer w0.2: ADC3.1@15.519,24.206 15.536,24.19 DD2.26
NetADC4_1: ADC4.1 DD2.25 | length 2.7
  Top Layer w0.2: DD2.25 16.535,21.768 ADC4.1@17.484,22.716
NetBOOT_1: BOOT.1 DD2.21 NOBOOT.1 | length 7.2
  Top Layer w0.2: v1(17.831,15.443) 17.848,15.46 DD2.21
  Bottom Layer w0.2: BOOT.1 17.831,16.619 v1(17.831,15.443) 19.818,15.443 20.05,15.675 20.5,16.125 20.5,16.55 NOBOOT.1
NetC1_1: C1.1 L1.1 R1.1 | length 3.5
  Top Layer w0.5: C1.1 R1.1@7.654,34.849 ; L1.1 5.85,34.964 C1.1@5.937,34.877
NetDD1_6: DD1.6 X1.1 | length 25.5
  Top Layer w0.2: X1.1 3.213,51.387 3.213,49.787 17.05,35.95 DD1.6
NetDD1_11: DD1.11 L1.2 XW2.1 | length 8.2
  Top Layer w0.5: XW2.1@3.43,38.079 3.479,38.128 L1.2@6.272,38.128 ; L1.2@5.772,38.128 L1.2 ; L1.2@6.248,38.177 DD1.11@11.495,38.177
NetDD1_14: DD1.14 R1.2 | length 2.6
  Top Layer w0.5: R1.2@8.765,34.849 11.349,34.849 DD1.14
NetDD2_9: DD2.9 I2C_SCL.1 | length 3.6
  Top Layer w0.2: DD2.9 7.56,10.46 v1(7.6,10.5)
  Bottom Layer w0.2: v1(7.6,10.5) I2C_SCL.1
NetDD2_10: DD2.10 I2C_SDA.1 | length 5.4
  Top Layer w0.2: DD2.10 8.24,9.46 v1(8.3,9.4)
  Bottom Layer w0.2: v1(8.3,9.4) 8.4,9.5 I2C_SDA.1
NetDD2_12: DD2.12 XW1.1 | length 2.3
  Top Layer w0.5: XW1.1 3.336,7.46 DD2.12
NetDD2_13: DD2.13 SPI1_SI.1 | length 10.8
  Top Layer w0.2: DD2.13 13.536,7.236 v1(13.55,7.25)
  Bottom Layer w0.2: v1(13.55,7.25) 17.475,11.175 SPI1_SI.1
NetDD2_14: DD2.14 SPI1_SO.1 | length 8.9
  Top Layer w0.2: DD2.14 14.536,7.161 v1(15.375,8)
  Bottom Layer w0.2: v1(15.375,8) 16.625,9.25 SPI1_SO.1
NetDD2_15: DD2.15 SPI1_CLK.1 | length 6.9
  Top Layer w0.2: DD2.15 15.536,6.786 16.3,7.55 v1(17.275,7.55)
  Bottom Layer w0.2: v1(17.275,7.55) 17.309,7.516 20.259,7.516 SPI1_CLK.1
NetDD2_16: DD2.16 SPI1_CS.1 | length 4
  Top Layer w0.2: DD2.16 18.26,5.06 v1(18.3,5.1)
  Bottom Layer w0.2: v1(18.3,5.1) 19.859,5.1 20.334,5.575 SPI1_CS.1
NetDD2_20: DD2.20 PA9.1 | length 6.5
  Top Layer w0.2: v1(18.4,14.475) 20.436,14.475 DD2.20
  Bottom Layer w0.2: v1(18.4,14.475) PA9.1 PA9.1@22.825,14.45
NetDD2_27: DD2.27 PB12.1 | length 5.7
  Top Layer w0.2: DD2.27 14.536,25.936 PB12.1
NetDD2_29: DD2.29 PA0.1 | length 2.3
  Top Layer w0.2: PA0.1@12.525,22.629 12.536,22.618 DD2.29
NetDD2_32: DD2.32 R3.1 R6.2 VBAT_ADC.1 | length 27.6
  Top Layer w0.2: DD2.32 9.536,24.136 VBAT_ADC.1 22.4,27.9 26.95,32.45 R3.1 R6.2@28.8,33.6
NetTP1_1: 
NetTP2_1: 
PA1: DD2.6 PA1.1 | length 3.7
  Top Layer w0.2: DD2.6 7.46,13.46 v1(7.5,13.5)
  Bottom Layer w0.2: v1(7.5,13.5) PA1.1
PA8: DD2.19 PA8.1 X2.1 | length 7.5
  Top Layer w0.2: DD2.19 21.336,9.46 21.347,9.449 PA8.1 24.143,8.185 24.143,7.906 25.145,6.904 25.157,6.904 25.274,6.787 X2.1
RX: DD2.1 XP1.2 | length 11.2
  Top Layer w0.2: XP1.2 5.636,24.264 DD2.1
SWCLK: DD2.8 XP2.3 | length 8.8
  Top Layer w0.2: XP2.3@1.5,17.66 3.3,15.86 3.3,12.3 4.14,11.46 DD2.8
SWDIO: DD2.7 XP2.2 | length 10.3
  Top Layer w0.2: XP2.2@1.5,20.2 3.7,18 3.7,12.9 4.14,12.46 DD2.7
TX: DD2.2 XP1.3 | length 16.4
  Top Layer w0.2: XP1.3 7,25.44 7,17.9 6.56,17.46 DD2.2
VBAT: C7.1 DA1.A2 DA1.A3 DA1.B2 R3.2 X3.1 | length 12.4
  Top Layer w0.2: R3.2 31.15,31.15 X3.1 32,29.968 31.18,29.148 C7.1 31.306,27.383 DA1.A3 DA1.A2 DA1.B2
pads on no net: DD1.4 DD1.5 DD1.13 DD1.16 DD1.17 DD1.18 DD2.3

## Polygon pours and split planes (outlines as drawn)
GND on Top Layer "GND_L01_P005" (solid, pour order 5): 0.5,3.5 34.5,3.5 34.5,64.5 0.5,64.5
GND on Bottom Layer "GND_L02_P000" (solid, pour order 0): 0.497,3.5 34.497,3.5 34.497,64.512 0.497,64.512

## Other copper
Top Layer:
  pour cut-out: 30.75,26 33.5,26 33.5,22.5 30.75,22.5

## Silkscreen, mask and mechanical layers (free items; w line width, h text height)
Top Overlay:
  drawing of 56 lines, arcs and shapes, not listed
Bottom Overlay:
  drawing of 52 lines, arcs and shapes, not listed
  text "Author: Baiguanysh S. / Project: Peggy Tracker v2" at 24.79,45.137 h0.75
  text "GND" at 3.275,32.52 h1
  text "TX" at 3.275,29.98 h1
  text "RX" at 3.275,27.44 h1
  text "3V3" at 3.275,24.9 h1
  text "3V3" at 3.275,22.36 h1
  text "DIO" at 3.275,19.82 h1
  text "CL" at 3.275,17.28 h1
  text "RST" at 3.275,14.78 h1
  text "GND" at 3.275,12.2 h1
Top Assembly:
  circle w0.254: c19.132,53.391 r10.036
Board:
  the board outline again, w0.254

## Dimensions
0,65 to 35,3 on Graphics
0,65 to 0,3 on Graphics